# Altium PCB ControlsPcbv1.PcbDoc
Units mil, origin at the board's own origin, x right, y up, seen from the top; angles counter-clockwise.
Board outline 2379.72 x 2809.71 mil, 2 copper layers (Top Layer, Bottom Layer); 5 components, 11 nets, 108 pads, 0 vias.
Unrouted connection lines stored in the file: 5.
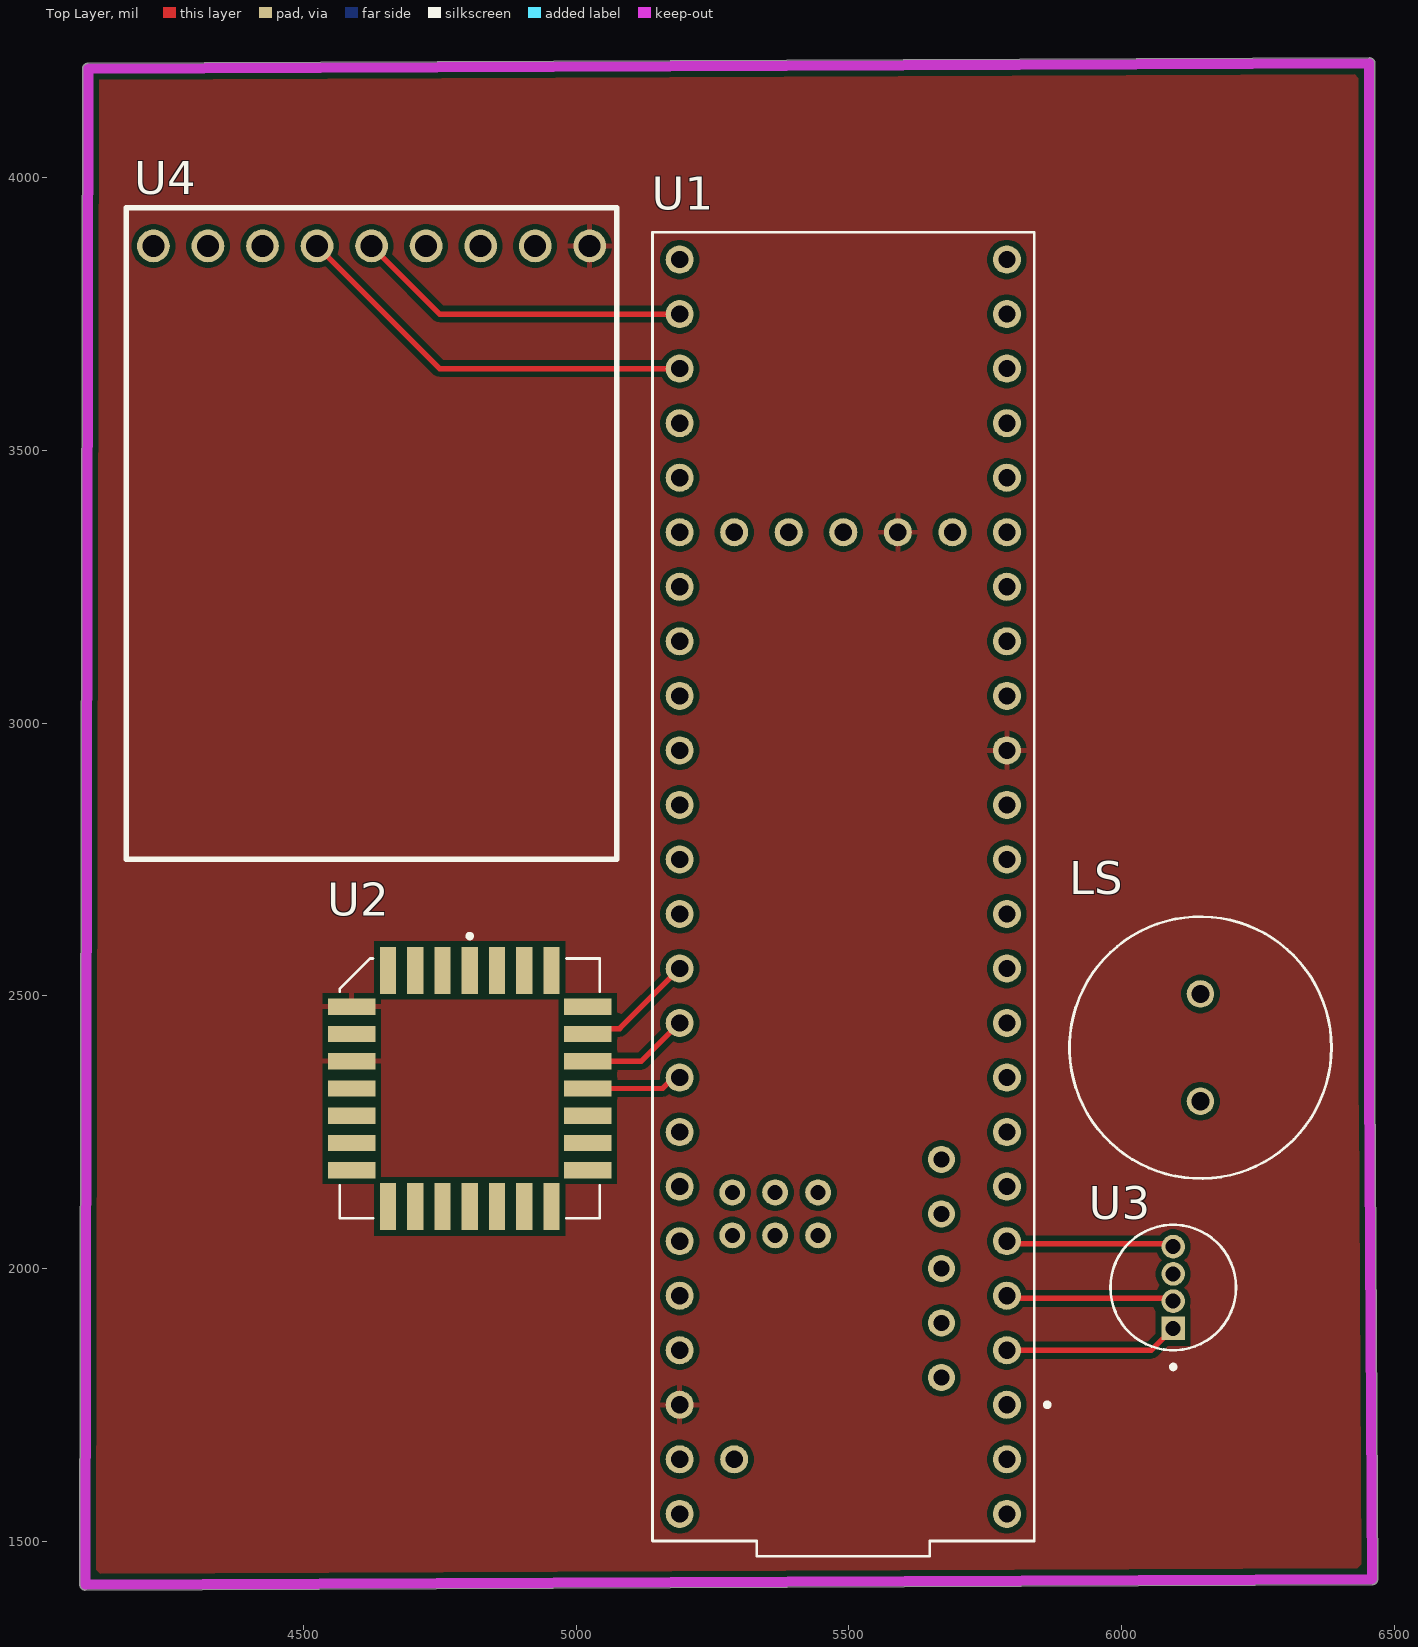
[diagram p0: Top Layer view]
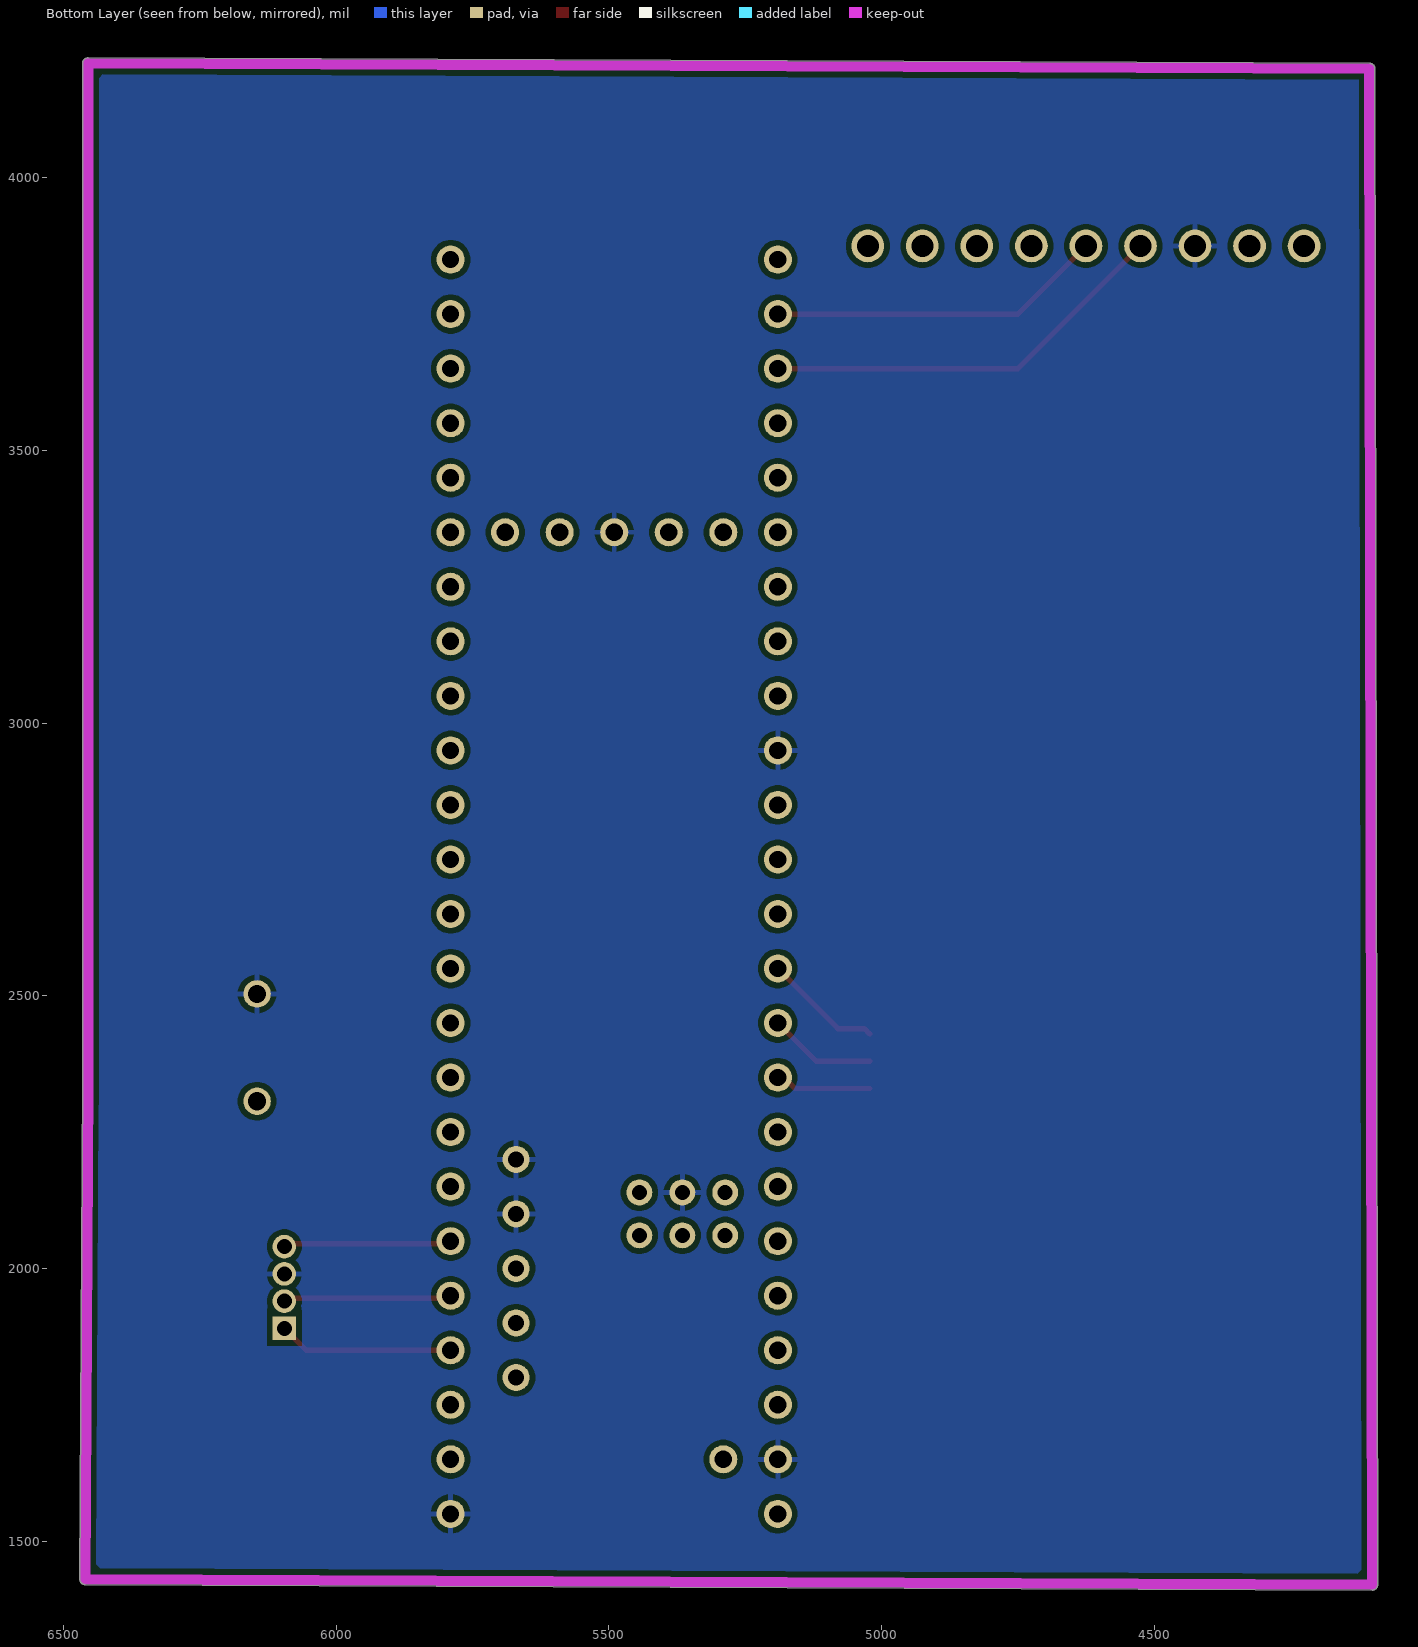
[diagram p1: Bottom Layer view, seen from below]
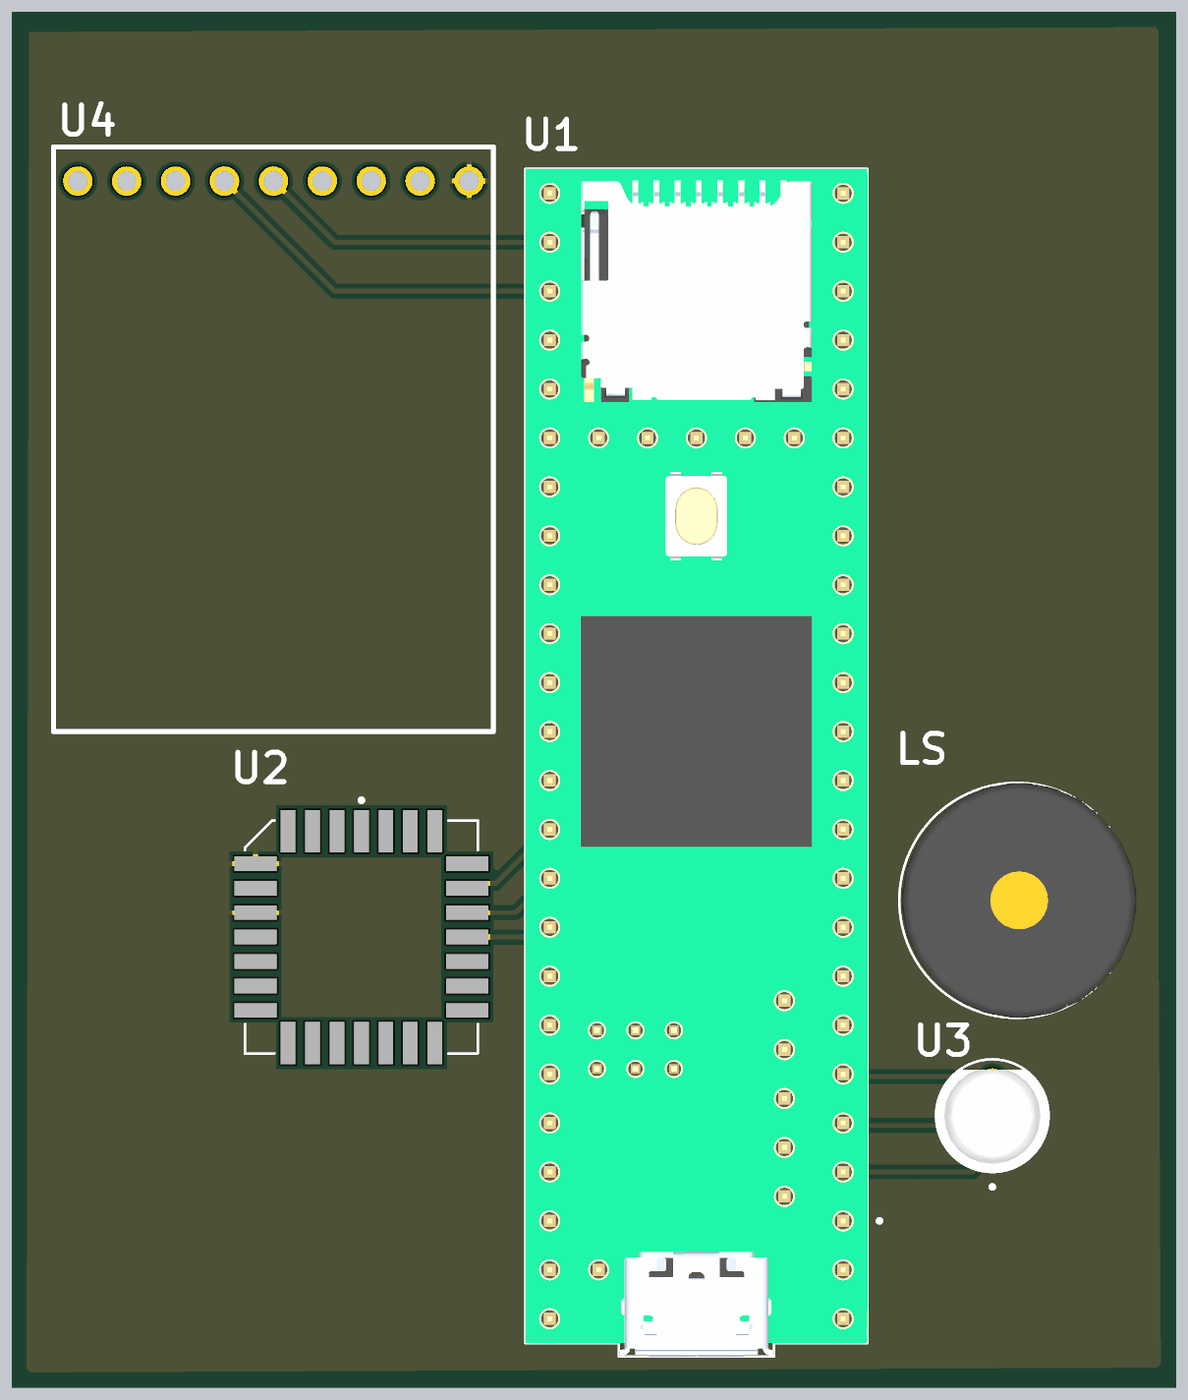
[diagram p2: 3D render of the assembled board from above, using the file's embedded part models]

## Layer stack, top to bottom
Top Solder: solder mask 0.4, Solder Resist, Dk 3.5
Top Layer: signal copper 1.4
Dielectric 1: dielectric 12.6, FR-4, Dk 4.8
Bottom Layer: signal copper 1.4
Bottom Solder: solder mask 0.4, Solder Resist, Dk 3.5

## Board outline
4090.14,1420.02 ccw(c4100,1420) 4100.06,1410.14 6460.03,1420.14 ccw(c6460,1430) 6469.86,1430 6469.86,1430.05 6464.86,2340.05 6464.86,2340.04 6464.86,4210 ccw(c6455,4210) 6454.94,4219.86 4104.97,4209.86 ccw(c4105,4200) 4095.14,4200.02

## Design rules (kind name [scope] priority, off if disabled: settings)
Clearance [All] p1: gap=10 ignorepadtopadclearanceinfootprint=FALSE
PolygonConnect [All] p1: connectstyle=Relief reliefconductorwidth=10 reliefentries=4 polygonreliefangle="90 Angle" airgapwidth=10
RoutingVias [All] p1: holewidth=28 width=50 viastyle="Through Hole" minholewidth=28 minwidth=50 maxholewidth=28 maxwidth=50
SolderMaskExpansion [All] p1: expansion=4 istentingtop=FALSE
SupplyNets "Schematic Supply Nets_1" [InNet('3v3')] p1: voltage=0.000
SupplyNets "Schematic Supply Nets" [InNet('GND')] p2: voltage=0.000
Width [All] p1: maxlimit=10 minlimit=10 preferedwidth=10
30 further rules are at their usual default settings.

## Components (designator, comment, footprint, x,y, rotation, side; value= is the part's Value field where it differs from the comment)
LS "PS1240P02BT" XDCR_PS1240P02BT 6145,2405 r270 top
U1 "DEV-16771" MODULE_DEV-16771 5490,2700 r90 top
U2 "MTI-3-8A7G6T" MODULE_MTI-3-8A7G6T 4805,2330 r0 top
U3 "QBL8RGB60D0-2897" LED_QBL8RGB60D0-2897 6095,1965 r90 top (schematic designator https://www.digikey.com/en/mylists/list/L1)
U4 "GPS" Ultimate-GPS-v3 4225,3875 r270 top

## Footprints (in the part's own frame and the unit in brackets; to place one, negate y for a bottom-side part, rotate by r counter-clockwise, add the part's x,y. Pads: shape width x height; smd on the part's side, far side on the other; paste and mask are expansions set on the pad)
LED_QBL8RGB60D0-2897 [mm]
  rect 1.1x1.1 / inner round 1.1 / far side rect 1.1x1.1 hole 0.7: 1(-1.905,0)
  round 1.1 hole 0.7: 2(-0.635,0) 3(0.635,0) 4(1.905,0)
  silkscreen extent -3.8,-2.93 2.92,2.93, body extent -2.93,-2.93 2.4,2.93, height 8.65
MODULE_DEV-16771 [mm]
  round 1.308 hole 0.8: 0(-26.67,-7.62) 1(-24.13,-7.62) 2(-21.59,-7.62) 3(-19.05,-7.62) 3.3V_1(6.35,-7.62) 3.3V_2(-24.13,7.62) 3.3V_3(16.51,-2.54) 4(-16.51,-7.62) 5(-13.97,-7.62) 6(-11.43,-7.62) 7(-8.89,-7.62) 8(-6.35,-7.62) 9(-3.81,-7.62) 10(-1.27,-7.62) 11(1.27,-7.62) 12(3.81,-7.62) 13(3.81,7.62) 14(1.27,7.62) 15(-1.27,7.62) 16(-3.81,7.62) 17(-6.35,7.62) 18(-8.89,7.62) 19(-11.43,7.62) 20(-13.97,7.62) 21(-16.51,7.62) 22(-19.05,7.62) 23(-21.59,7.62) 24(8.89,-7.62) 25(11.43,-7.62) 26(13.97,-7.62) 27(16.51,-7.62) 28(19.05,-7.62) 29(21.59,-7.62) 30(24.13,-7.62) 31(26.67,-7.62) 32(29.21,-7.62) 33(29.21,7.62) 34(26.67,7.62) 35(24.13,7.62) 36(21.59,7.62) 37(19.05,7.62) 38(16.51,7.62) 39(13.97,7.62) 40(11.43,7.62) 41(8.89,7.62) GND1(-29.21,-7.62) GND2(6.35,7.62) GND3(-26.67,7.62) GND4(16.51,0) ON/OFF(16.51,5.08) PROGRAM(16.51,2.54) VBAT(16.51,-5.08) VIN(-29.21,7.62) VUSB(-26.67,5.08)
  round 1.258 hole 0.75: 5V(-22.86,-4.57) D+(-17.78,-4.57) D-(-20.32,-4.57) USB_GND1(-15.24,-4.57) USB_GND2(-12.7,-4.57)
  round 1.208 hole 0.7: GND5(-14.24,3.17) LED(-16.24,3.17) R+(-16.24,5.17) R-(-14.24,5.17) T+(-14.24,1.17) T-(-16.24,1.17)
  silkscreen extent -31.18,-9.6 30.48,8.89, body extent -31.18,-8.89 30.48,8.89, height 7.15
MODULE_MTI-3-8A7G6T [mm]
  rect 0.76x2.2 smd: 1(0,5.5) 2(-1.27,5.5) 3(-2.54,5.5) 4(-3.81,5.5) 12(-3.81,-5.5) 13(-2.54,-5.5) 14(-1.27,-5.5) 15(0,-5.5) 16(1.27,-5.5) 17(2.54,-5.5) 18(3.81,-5.5) 26(3.81,5.5) 27(2.54,5.5) 28(1.27,5.5)
  rect 2.2x0.76 smd: 5(-5.5,3.81) 6(-5.5,2.54) 7(-5.5,1.27) 8(-5.5,0) 9(-5.5,-1.27) 10(-5.5,-2.54) 11(-5.5,-3.81) 19(5.5,-3.81) 20(5.5,-2.54) 21(5.5,-1.27) 22(5.5,0) 23(5.5,1.27) 24(5.5,2.54) 25(5.5,3.81)
  silkscreen extent -6.05,-6.05 6.05,7.2
Ultimate-GPS-v3 [mil]
  round 60 hole 40.16: 1(0,800) 2(0,700) 3(0,600) 4(0,500) 5(0,400) 6(0,300) 7(0,200) 8(0,100) 9(0,0)
  silkscreen extent -70,-50 1125,850
XDCR_PS1240P02BT [mm]
  round 1.28 hole 0.85: 1(-2.5,0) 2(2.5,0)
  silkscreen extent -6.1,-6.1 6.1,6.1, body extent -6.1,-5.97 6.1,6.23, height 6

## Part data
LS: "Buzzers Transducer, Externally Driven Piezo 3V 4kHz 60dB @ 3V, 10cm Through Hole PC Pins", Package="2020 TDK", Availability=Unavailable, MF=TDK, MP=PS1240P02BT, Price=None, SnapEDA_Link=https://www.snapeda.com/parts/PS1240P02BT/TDK/view-part/53420/?ref=snap
U1: "RT1062 Teensy 4.1 series ARM® Cortex®-M7 MPU Embedded Evaluation Board", Package=None, Check_prices=https://www.snapeda.com/parts/DEV-16771/SparkFun+Electronics/view-part/?ref=eda, MF="SparkFun Electronics", MP=DEV-16771, SnapEDA_Link=https://www.snapeda.com/parts/DEV-16771/SparkFun+Electronics/view-part/?ref=snap
U2: "Accelerometer, Gyroscope, Magnetometer, 9 Axis Sensor IÂ²C, SPI Output", Package="SMD-28 Xsens Technologies", Availability=Bad, Check_prices=https://www.snapeda.com/parts/MTI-3-8A7G6T/XSens%20Technologies%20BV/view-part/1464840/?ref=eda, MF="XSens Technologies", MP=MTI-3-8A7G6T, Price=None, SnapEDA_Link=https://www.snapeda.com/parts/MTI-3-8A7G6T/XSens%20Technologies%20BV/view-part/1464840/?ref=snap
U3: "Red, Green, Blue (RGB) 624nm Red, 525nm Green, 470nm Blue LED Indication - Discrete 2V Red, 3.2V Green, 3.2V Blue Radial", Package="Radial QT Brightek (QTB)", Check_prices=https://www.snapeda.com/parts/QBL8RGB60D0-2897/QT/view-part/?ref=eda, MF="QT Brightek (QTB)", MP=QBL8RGB60D0-2897, SnapEDA_Link=https://www.snapeda.com/parts/QBL8RGB60D0-2897/QT/view-part/?ref=snap
U4: library part Ultimate-GPS-v3

## Nets (pads, with @x,y where several pads share a name; then routed paths per layer and width w, separated by ;. In a path a pad name is that pad's centre, name@x,y a point inside that pad or via, vN(x,y) a via of type N, cw(c..) or ccw(c..) an arc to the next point about the centre after c; other vN are vias at no path point)
3v3: U1.3.3V_1 U1.3.3V_2 U1.3.3V_3 U2.5 U2.7 U4.1
DRDY: U1.18 U2.22 | length 176.7
  Top Layer w10: U2.22 5158.77,2330 5178.77,2350 U1.18
GND: LS.1 U1.GND1 U1.GND2 U1.GND3 U1.GND4 U1.GND5 U1.USB_GND1 U1.USB_GND2 U2.4 U2.8 U2.13 U2.25 U3.3 U4.7
LED_BLUE: U1.3 U3.2 | length 309.1
  Top Layer w10: U1.3 5795,1945 6090,1945 U3.2
LED_GREEN: U1.2 U3.1 | length 321.6
  Top Layer w10: U1.2 6055,1850 U3.1
LED_RED: U1.4 U3.4 | length 309.1
  Top Layer w10: U1.4 5795,2045 6090,2045 U3.4
PIEZO_IN: LS.2 U1.5
RX8: U1.34 U4.5 | length 616.8
  Top Layer w10: U4.5 4750,3750 U1.34
SCL: U1.16 U2.24 | length 218.2
  Top Layer w10: U2.24 5031.38,2439.84 5079.84,2439.84 U1.16
SDA: U1.17 U2.23 | length 197.5
  Top Layer w10: U2.23 5120,2380 U1.17
TX8: U1.35 U4.6 | length 758.2
  Top Layer w10: U4.6 4750,3650 U1.35
pads on no net: U1.0 U1.1 U1.5V U1.6 U1.7 U1.8 U1.9 U1.10 U1.11 U1.12 U1.13 U1.14 U1.15 U1.19 U1.20 U1.21 U1.22 U1.23 U1.24 U1.25 U1.26 U1.27 U1.28 U1.29 U1.30 U1.31 U1.32 U1.33 U1.36 U1.37 U1.38 U1.39 U1.40 U1.41 U1.D+ U1.D- U1.LED U1.ON/OFF U1.PROGRAM U1.R+ U1.R- U1.T+ U1.T- U1.VBAT U1.VIN U1.VUSB U2.1 U2.2 U2.3 U2.6 U2.9 U2.10 U2.11 U2.12 U2.14 U2.15 U2.16 U2.17 U2.18 U2.19 U2.20 U2.21 U2.26 U2.27 U2.28 U4.2 U4.3 U4.4 U4.8 U4.9

## Polygon pours and split planes (outlines as drawn)
3v3 on Top Layer "3V3" (solid, pour order 0): 4090.14,1420.02 ccw(c4100,1420) 4100.06,1410.14 6460.03,1420.14 ccw(c6460,1430) 6469.86,1430 6469.86,1430.05 6464.86,2340.05 6464.86,2340.04 6464.86,4210 ccw(c6455,4210) 6454.94,4219.86 4104.97,4209.86 ccw(c4105,4200) 4095.14,4200.02
GND on Bottom Layer "GND" (solid, pour order 1): 4090.14,1420.02 ccw(c4100,1420) 4100.06,1410.14 6460.03,1420.14 ccw(c6460,1430) 6469.86,1430 6469.86,1430.05 6464.86,2340.05 6464.86,2340.04 6464.86,4210 ccw(c6455,4210) 6454.94,4219.86 4104.97,4209.86 ccw(c4105,4200) 4095.14,4200.02

## Keep-outs
Keep-Out Layer:
  lines w19.68: 6455,2300 6455,4210 4105,4200 4100,1420 6460,1430 6455,2340

## Text inside footprints (layer, text, board x,y; h text height)
U1: Mechanical 13 "Teensy 4.1" at 5476.61,2690.16 h50 r90